# EAGLE board eurorack-passive-diodefuzz (EAGLE 9.6.2)
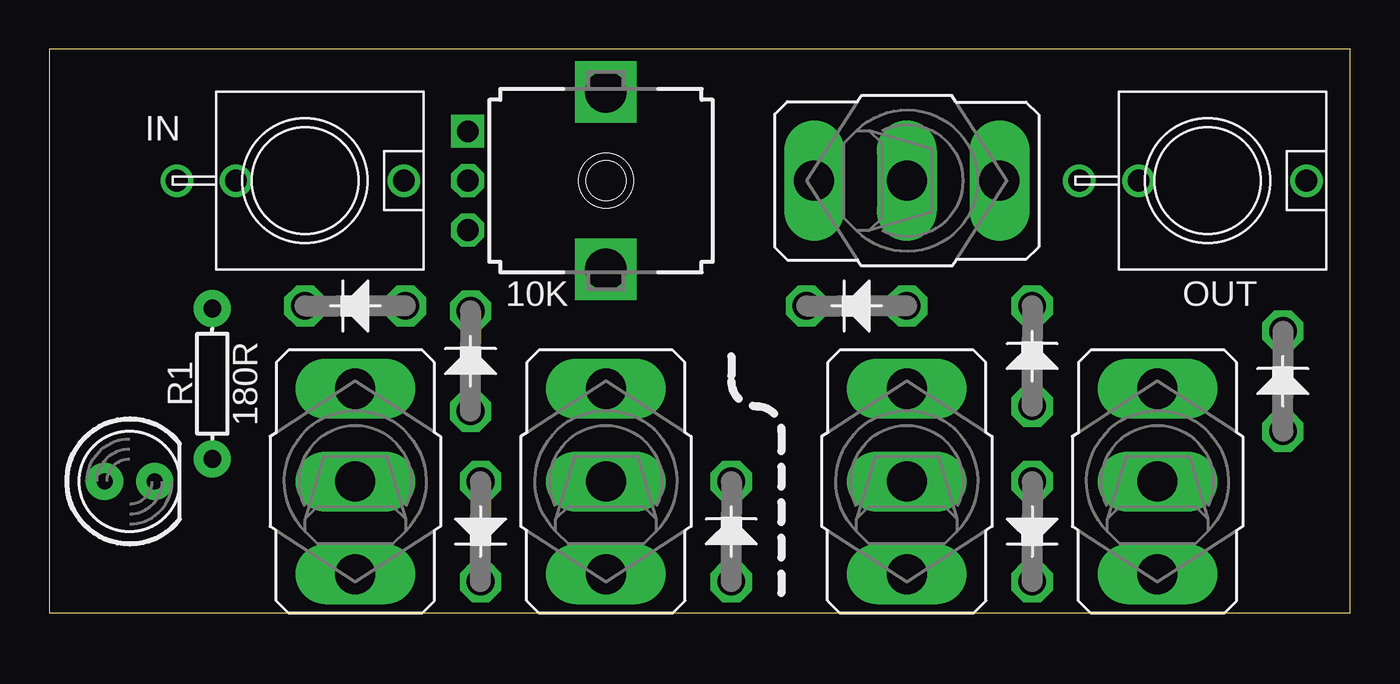
[diagram p0: board, top side]
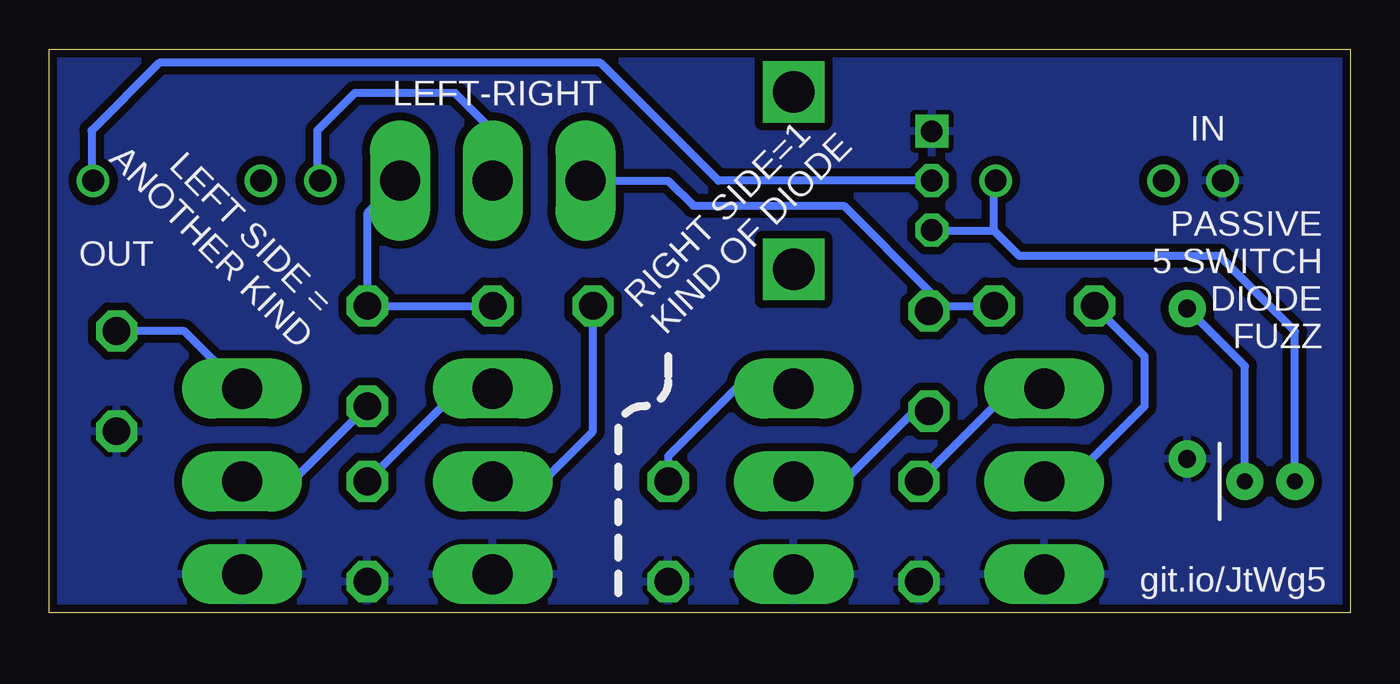
[diagram p1: board, bottom side, seen from below]

Size 65.89 x 28.55 mm. Coordinates in mm from the lower left corner, seen from the top.
Outline: 0,0 65.89,0 65.89,28.55 0,28.55 0,0
Copper layers (1*16): Top 0.0356mm / dielectric 1.5011mm / Bottom 0.0356mm
Design rules "oshpark-2layer": minimum track width 6mil, minimum drill 13mil, track to track 6mil, track to pad 6mil, pad to pad 6mil, via to via 6mil, smd to smd 6mil, copper to edge 15mil, drill to drill 6mil, minimum pad ring 7mil, minimum via ring 7mil, stop-mask expansion 2.5mil, vias tented up to drill 0mil, thermal gap 10mil

## Footprints (pad centres in the part's own frame; a part is rotated, then mirrored left to right if it is on the bottom)
LED_5MM = drill 0.813 pad 1.88: A -1.27,0; K 1.27,0
C1702-05 = drill 1.397 octagon: A 2.54,0; C -2.54,0
AXIAL-0.3 = drill 0.9 pad 1.88: P$1 -3.81,0; P$2 3.81,0
EVUF = drill 1.1 pad 1.676 square: 1 -2.5,-7 | drill 1.1 pad 1.676 octagon: 2 0,-7; 3 2.5,-7 | drill 2.1 pad 2.8 square: M1 4.5,0; M2 -4.5,0
M9040P = drill 2.03 long: 1 0,4.699; 2 0,0; 3 0,-4.699
WQP-PJ301M-12_JACK = drill 1.1: P$1 0,5; P$2 0,-3.5; P$3 0,-6.5

## Placement (x,y rotation side)
D1  [LED_5MM]  4.06,6.65 0 top
D2  VERTICAL_DIODE  [C1702-05]  15.49,15.54 0 top
D3  VERTICAL_DIODE  [C1702-05]  21.34,12.75 270 top
D4  VERTICAL_DIODE  [C1702-05]  21.84,4.11 90 top
D5  VERTICAL_DIODE  [C1702-05]  34.54,4.11 270 top
D6  VERTICAL_DIODE  [C1702-05]  40.89,15.54 0 top
D7  VERTICAL_DIODE  [C1702-05]  49.78,4.11 90 top
D8  VERTICAL_DIODE  [C1702-05]  49.78,13 270 top
D9  VERTICAL_DIODE  [C1702-05]  62.48,11.73 270 top
FRAME1  FRAME-LETTERNO_PACKAGE  [DUMMY]  -1.02,-3.51 0 top  (outside the outline)
R1  180R  [AXIAL-0.3]  8.25,11.61 90 top
R2  10K  [EVUF]  28.19,21.89 270 top
S1  [M9040P]  15.49,6.65 0 top
S2  [M9040P]  28.19,6.65 0 top
S3  [M9040P]  43.43,21.89 270 top
S4  [M9040P]  43.43,6.65 0 top
S5  [M9040P]  56.13,6.65 0 top
U$1  OUT  [WQP-PJ301M-12_JACK]  58.67,21.89 270 top
U$2  IN  [WQP-PJ301M-12_JACK]  12.95,21.89 270 top

## Library data of the parts
D1 = SparkFun-LED
D2-D9 = rahji
FRAME1 = SparkFun-Aesthetics; DESIGNER: Nobody; VERSION: v01
R1 = SparkFun-Resistors; PROD_ID: RES-8371
R2 S1-S5 = TomW
U$1 U$2 = thonkiconn

## Nets
GND: D4.C D5.A D7.C D9.A R1.P$1 R2.1 S1.3 S2.3 S4.3 S5.3 U$2.P$3
N$1: D1.A R2.3 U$2.P$1
N$2: D1.K R1.P$2
N$3: R2.2 U$1.P$1
N$4: S3.2 U$1.P$3
N$5: D2.A D3.C S3.3
N$6: D2.C S1.2
N$7: D3.A S2.2
N$8: D4.A S1.1
N$9: D6.C S4.2
N$10: D5.C S2.1
N$11: D8.A S5.2
N$14: D6.A D8.C S3.1
N$15: D7.A S4.1
N$18: D9.C S5.1

## Tracks (layer width: path | path; a pad name or v marks a point on that pad's centre or on a via)
GND
  pour Bottom (isolate 0.406): -1.02,32.05 67.56,32.05 67.56,-2.24 -1.02,-2.24
N$1
  Bottom 0.406: D1.A 2.79,14.27 6.6,18.08 16.76,18.08 18.03,19.35 | 18.03,19.35 18.03,21.81 U$2.P$1 | R2.3 21.15,19.35 18.03,19.35
N$2
  Bottom 0.406: D1.K 5.33,12.5 R1.P$2
N$3
  Bottom 0.406: R2.2 32,21.89 37.97,27.86 60.32,27.86 63.75,24.43 63.75,21.97 U$1.P$1
N$4
  Bottom 0.406: S3.2 43.43,24.43 45.34,26.34 50.42,26.34 52.32,24.43 52.32,21.89 U$1.P$3
N$5
  Bottom 0.406: S3.3 34.54,21.89 33.27,20.62 25.65,20.62 21.34,16.31 D3.C 21.08,15.54 D2.A
N$6
  Bottom 0.406: D2.C 10.41,13 10.41,10.46 12.32,8.56 14.22,6.65 S1.2
N$7
  Bottom 0.406: S2.2 25.65,6.65 21.84,10.46 21.59,10.46 D3.A
N$8
  Bottom 0.406: D4.A 17.14,11.35 S1.1
N$9
  Bottom 0.406: S4.2 40.89,6.65 38.35,9.19 D6.C
N$10
  Bottom 0.406: S2.1 31.12,11.35 34.54,7.92 D5.C
N$11
  Bottom 0.406: D8.A 53.59,6.65 S5.2
N$14
  Bottom 0.406: S3.1 49.78,20.24 D8.C D6.A
N$15
  Bottom 0.406: D7.A 44.7,11.73 43.43,11.73 S4.1
N$18
  Bottom 0.406: S5.1 59.05,14.27 D9.C

## Text on the board
tNames: IN | OUT
bNames: LEFT-RIGHT | IN | OUT | LEFT SIDE = / ANOTHER KIND | RIGHT SIDE=1 / KIND OF DIODE | PASSIVE / 5 SWITCH / DIODE / FUZZ | git.io/JtWg5